# Altium PCB NS6202_V4.1.PcbDoc (part 2 of 2)
Units mm, origin at the board's own origin, x right, y up, seen from the top; angles counter-clockwise.
Board outline 63.75 x 63.6 mm, 4 copper layers (Top, VCC, GND, Bottom), stack 0.776 mm thick; 132 components, 151 nets, 534 pads, 404 vias.
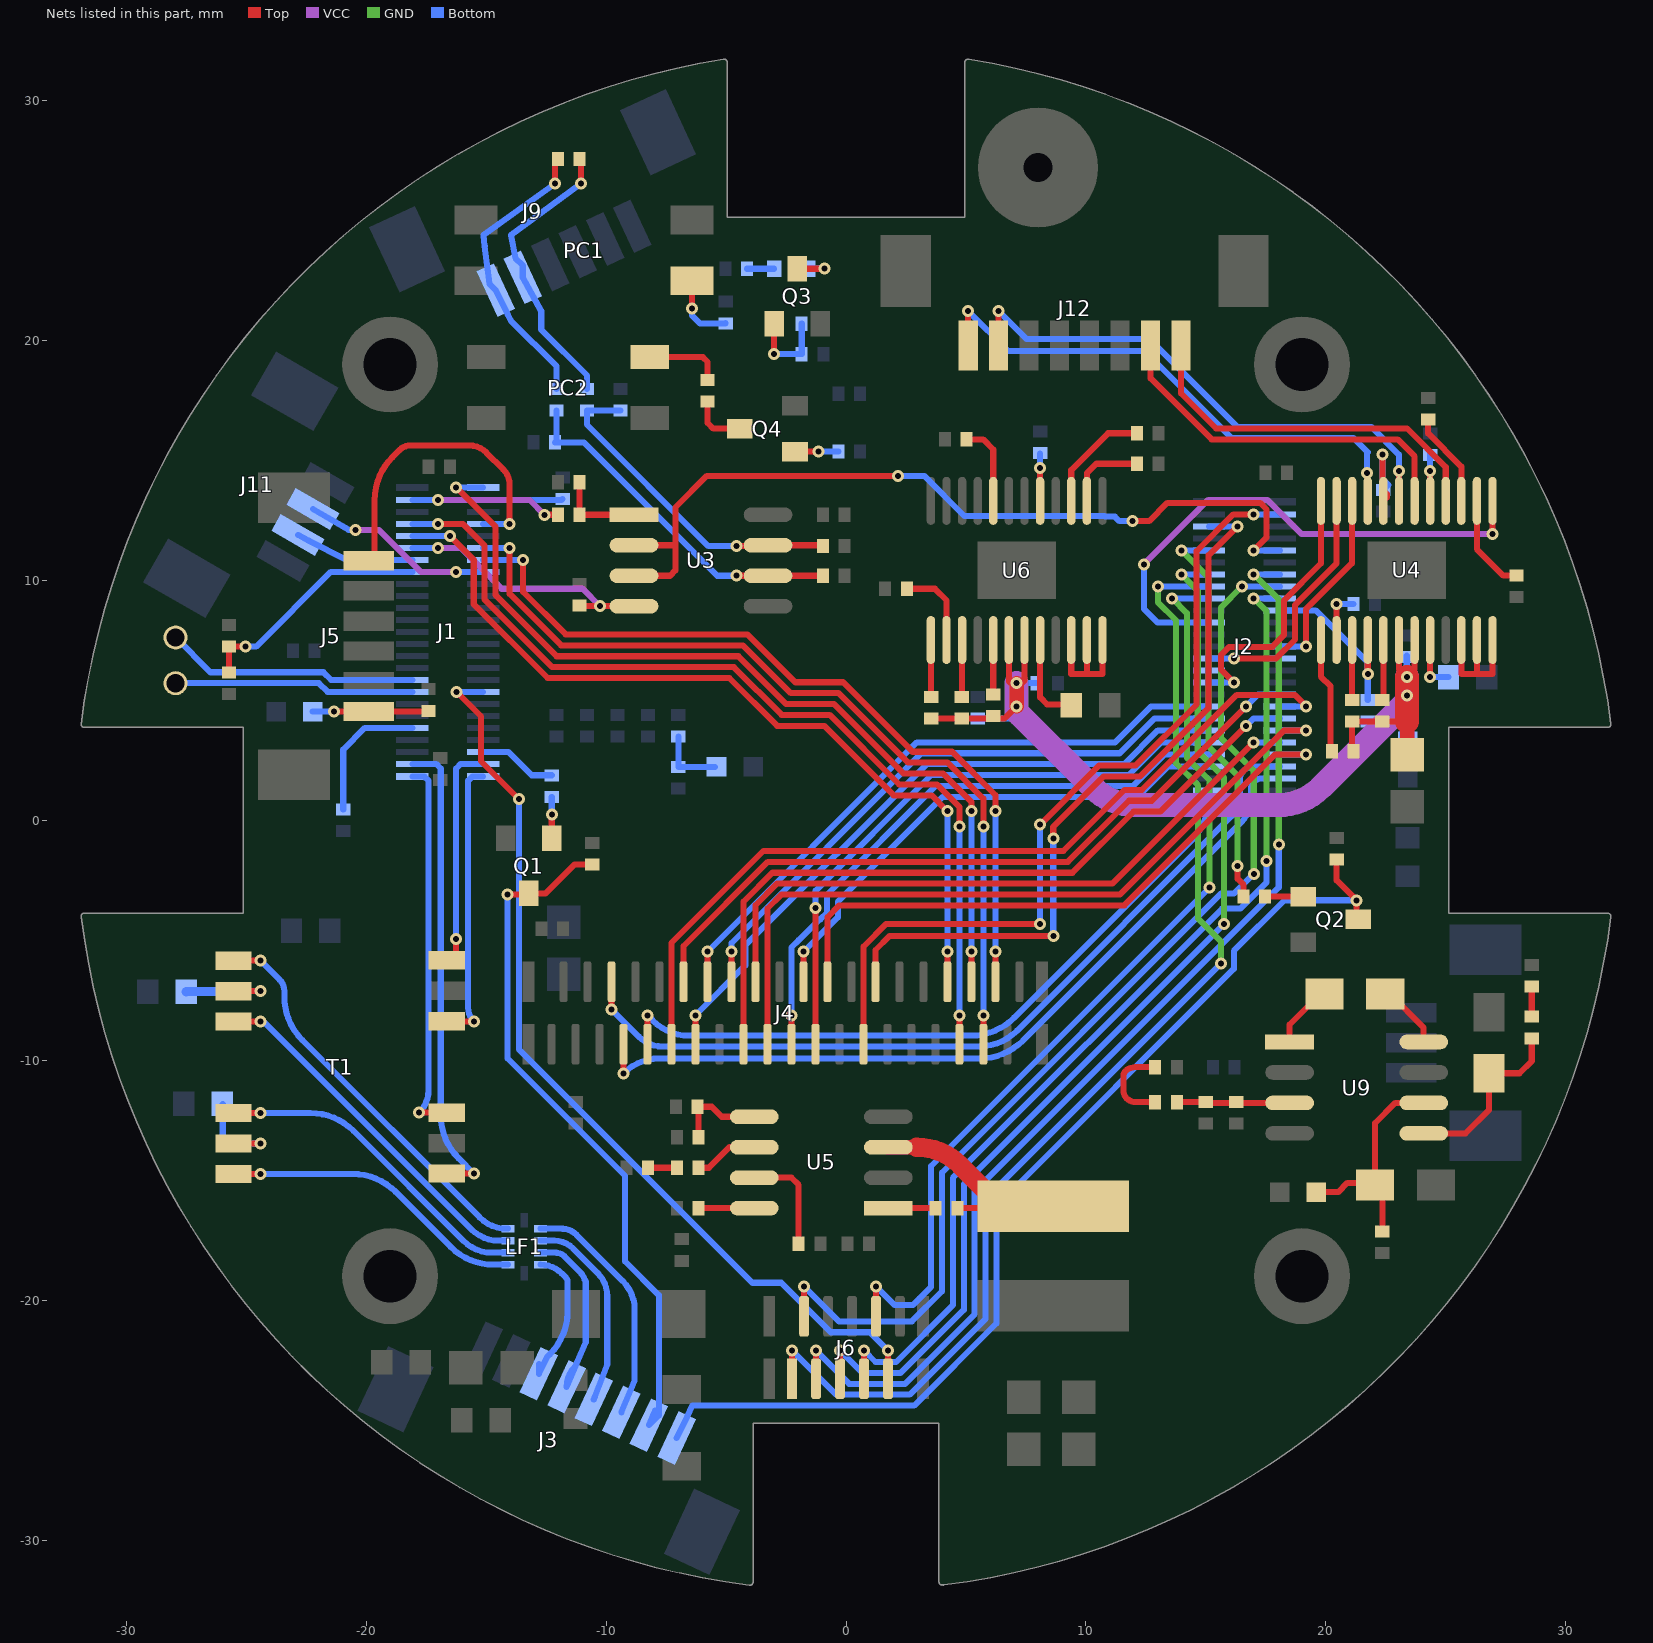
[diagram p4: the nets of this part, all layers, seen from the top]

## Via types
v1: diameter 0.5, hole 0.25, Top to Bottom, tented both sides, 403 vias
v2: diameter 0.5, hole 0.25, Top to Bottom, 1 vias

## Nets (pads, with @x,y where several pads share a name; then routed paths per layer and width w, separated by ;. In a path a pad name is that pad's centre, name@x,y a point inside that pad or via, vN(x,y) a via of type N, cw(c..) or ccw(c..) an arc to the next point about the centre after c; other vN are vias at no path point) (continued)
IR_PWM: J1.7 J5.6 | length 13.3
  Top w0.254: J5.6@-19.897,10.82 cw(c-19.651,10.574) -19.651,10.922 -19.651,13.333 cw(c-17.111,13.333) -19.431,14.367 cw(c-17.111,13.333) -18.907,15.129 -18.595,15.441 cw(c-18.161,15.008) -18.161,15.621 -15.698,15.621 cw(c-15.698,14.614) -14.986,15.326 -14.291,14.631 ; -14.29,14.63 cw(c-14.951,13.97) -14.017,13.97 v1(-14.017,12.35)
  Bottom w0.254: J1.7@-15.125,12.35 v1(-14.017,12.35)
LED0: J3.7 Q1.3 R5.2 | length 29.6
  Top w0.254: v1(-14.107,-3.093) v1@-14.059,-3.044 ; v1@-14.001,-3.093 Q1.3@-13.16,-3.093 ; Q1.3@-13.218,-3.044 -12.517,-3.044 -11.32,-1.847 R5.2@-10.583,-1.847
  Bottom w0.254: v1(-14.107,-3.093) -14.107,-9.925 -9.212,-14.82 -9.212,-18.374 -7.801,-19.785 -7.801,-24.794 J3.7@-8.213,-25.206 -8.033,-24.779 J3.7@-7.955,-24.592
LED1: J3.8 Q2.3 R6.2 | length 44.1
  Top w0.254: R6.2@20.447,-1.637 20.447,-2.499 v1(21.281,-3.333) 21.281,-4.067 Q2.3@21.344,-4.129
  Bottom w0.254: J3.8@-7.062,-25.743 -6.625,-24.846 -6.403,-24.391 2.838,-24.391 6.27,-20.959 6.27,-16.082 16.164,-6.188 16.164,-5.442 18.273,-3.333 v1(21.281,-3.333)
LED_GN: J2.10 R3.2 | length 16.7
  Top w0.254: v1(16.317,-1.905) 16.317,-2.442 16.568,-2.693 R3.2@16.568,-3.175
  GND w0.254: v1(13.97,11.25) 15.113,10.107 15.113,3.069 16.317,1.865 v1(16.317,-1.905)
  Bottom w0.254: v1(13.97,11.25) J2.10@15.125,11.25
LED_MLINK: J1.45 R4.2 | length 3.3
  Bottom w0.254: J1.45@-15.125,2.85 -14.07,2.85 -13.098,1.878 R4.2@-12.264,1.878
LENC_IRIS_PWM1: J2.30
LENC_IRIS_PWM2: J2.27
MVDD: C20.2 C21.2 C23.1 C26.1 C28.1 FB4.1 R27.2 R34.1 R35.2 R36.1 R49.1 R50.1 U4.18 U4.19 U6.18 U6.19 | length 48
  Top w0.254: R50.1@3.537,4.249 6.611,4.249 v1(7.112,4.75) ; U6.18@6.787,7.514 6.787,5.786 6.858,5.715 v1(7.112,5.715) 7.331,5.715 7.437,5.821 U6.19@7.437,7.514 ; R36.1@21.093,2.887 R34.1@21.093,4.122 23.368,4.122 23.381,4.109 ; U4.18@23.043,7.514 23.043,6.294 v1(23.368,5.969) 23.693,6.294 U4.19@23.693,7.514
  Top w0.6: v1(7.112,4.75) v1(7.112,5.715) ; C26.1@23.381,2.73 23.381,4.109
  Top w1: 23.368,4.122 v1(23.368,5.207) v1(23.368,5.969)
  VCC w1: v1(7.112,5.715) 7.112,4.532 10.265,1.379 ccw(c12.061,3.175) 12.061,0.635 18.007,0.635 ccw(c18.007,3.175) 19.804,1.379 23.368,4.943 v1(23.368,5.969)
  Bottom w0.254: R35.2@5.487,4.249 7.111,4.249 ; v1(7.112,5.715) C23.1@7.932,5.715 ; R27.2@21.743,4.122 23.368,4.122 ; v1(23.368,5.969) C28.1@23.368,6.858
  Bottom w0.6: 7.111,4.249 v1(7.112,4.75) ; FB4.1@23.368,3.302 23.368,4.122 v1(23.368,5.207)
N15229178: Q3.1 R9.2 R10.2 | length 3.7
  Top w0.254: v1(-2.996,19.431) -2.996,20.684 Q3.1@-2.991,20.69
  Bottom w0.254: v1(-2.996,19.431) R10.2@-1.847,19.431 R9.2@-1.847,20.701
N15229370: D2.1 Q3.3 | length 1.7
  Top w0.254: Q3.3@-2.037,22.983 -2.033,22.987 v1(-0.889,22.987)
  Bottom w0.254: D2.1@-1.472,22.987 v1(-0.889,22.987)
N15229490: PC1.1 R13.2 | length 3
  Top w0.254: v1(-6.416,21.336) PC1.1@-6.416,22.483
  Bottom w0.254: v1(-6.416,21.336) -6.416,21.034 -6.083,20.701 -5.032,20.701 R13.2@-5.019,20.715
N16657531: D2.2 R12.2 | length 1.1
  Bottom w0.254: R12.2@-4.122,22.987 D2.2@-2.996,22.987
N16698572: Q4.3 R14.2 | length 2.3
  Top w0.254: R14.2@-5.773,17.457 -5.773,16.568 -5.529,16.324 Q4.3@-4.422,16.324
N17016752: R41.2 U5.7 | length 4.4
  Top w0.254: U5.7@-3.824,-14.893 -2.273,-14.893 -1.974,-15.192 R41.2@-1.974,-17.653
N17016775: C13.1 U5.8 | length 2.3
  Top w0.254: C13.1@-6.146,-16.163 U5.8@-3.824,-16.163
N17016804: C14.1 U5.6 | length 2.7
  Top w0.254: C14.1@-6.154,-14.478 -5.715,-14.478 -4.86,-13.623 U5.6@-3.824,-13.623
N17016806: C14.2 R44.2 | length 1.2
  Top w0.254: R44.2@-8.244,-14.478 C14.2@-7.054,-14.478
N17016820: R42.2 R43.2 U5.5 | length 3.8
  Top w0.254: R43.2@-6.154,-13.242 -6.154,-11.938 -5.595,-11.938 -5.18,-12.353 U5.5@-3.824,-12.353
N17016832: C15.2 L1.1 U5.3 | length 11.7
  Top w0.254: C15.2@4.637,-16.163 8.559,-16.163 L1.1@8.636,-16.086
  Top w0.6: U5.3@1.764,-13.623 2.948,-13.623 ; L1.1@5.719,-15.342 ccw(c7.515,-13.546) 7.515,-16.086 L1.1@8.636,-16.086
  Top w0.8: 2.948,-13.623 cw(c2.948,-16.163) 4.744,-14.367 L1.1@5.719,-15.342
N17334107: C4.2 R23.1 R24.2 U3.7 | length 13.9
  Top w0.254: v1(-4.572,11.43) -3.556,11.43 -3.541,11.445 U3.7@-3.249,11.445 ; U3.7@-3.249,11.464 C4.2@-0.992,11.464
  Bottom w0.254: R24.2@-9.398,17.076 R23.1@-10.795,17.076 -10.795,16.49 -5.735,11.43 v1(-4.572,11.43)
N17334109: R28.1 R31.2 U3.1 | length 3.6
  Top w0.254: R28.1@-11.107,14.097 R31.2@-11.107,12.734 U3.1@-8.837,12.734
N17334111: C5.2 R22.1 R29.1 U3.6 | length 14.8
  Top w0.254: v1(-4.572,10.194) U3.6@-3.249,10.194 C5.2@-0.958,10.194
  Bottom w0.254: R29.1@-12.065,17.076 -12.065,15.806 R22.1@-12.123,15.748 -10.922,15.748 -5.368,10.194 v1(-4.572,10.194)
N17340800: PC2.2 R14.1 | length 3.1
  Top w0.254: PC2.2@-8.186,19.304 -5.969,19.304 -5.773,19.108 R14.1@-5.773,18.538
N17346161: C24.1 R32.1 | length 1.6
  Bottom w0.254: R32.1@-25.977,-13.469 C24.1@-25.977,-11.831
N17346163: C25.1 R33.1 | length 1.5
  Bottom w0.4: C25.1@-27.495,-7.137 R33.1@-25.977,-7.119
N17347463: Q1.1 R4.1 | length 1.7
  Top w0.254: Q1.1@-12.264,-0.751 v1(-12.264,0.232)
  Bottom w0.254: v1(-12.264,0.232) R4.1@-12.264,0.978
N17347493: Q2.1 R3.1 | length 1.6
  Top w0.254: R3.1@17.468,-3.175 Q2.1@19.05,-3.175
N17383042: R34.2 U4.15 | length 2.5
  Top w0.254: R34.2@21.093,5.022 U4.15@21.093,7.514
N17383730: R37.1 U6.5 | length 2
  Top w0.254: U6.5@8.087,13.314 v1(8.087,14.691)
  Bottom w0.254: v1(8.087,14.691) R37.1@8.087,15.281
N17383732: R40.1 U6.8 | length 3.4
  Top w0.254: R40.1@5.022,15.875 5.715,15.875 6.137,15.453 U6.8@6.137,13.314
N17383734: R46.2 U6.3 | length 4.7
  Top w0.254: U6.3@9.387,13.314 9.387,14.594 10.922,16.129 R46.2@12.123,16.129
N17383736: R48.2 U6.2 | length 3.4
  Top w0.254: U6.2@10.037,13.314 10.037,14.463 10.433,14.859 R48.2@12.123,14.859
N17383752: U6.22 U6.23 U6.24 | length 5.6
  Top w0.254: U6.22@9.387,7.514 9.387,6.096 10.037,6.096 ; U6.23@10.037,7.514 10.037,6.096 ; U6.24@10.687,7.514 10.687,6.096 10.037,6.096
N17383760: C22.1 U6.20 | length 3.8
  Top w0.254: U6.20@8.087,7.514 8.087,5.121 8.382,4.826 C22.1@9.392,4.826
N17383762: R39.2 U6.14 | length 3.5
  Top w0.254: R39.2@2.533,9.652 3.702,9.652 4.187,9.167 U6.14@4.187,7.514
N17383772: R49.2 U6.15 | length 2.4
  Top w0.254: R49.2@4.826,5.149 4.837,5.16 U6.15@4.837,7.514
N17383775: R50.2 U6.13 | length 2.4
  Top w0.254: R50.2@3.537,5.149 U6.13@3.537,7.514
N17383778: C20.1 U6.17 | length 2.4
  Top w0.254: C20.1@6.137,5.149 U6.17@6.137,7.514
N17383808: R45.1 U4.5 | length 1.9
  Top w0.254: U4.5@24.343,13.314 v1(24.343,14.549)
  Bottom w0.254: v1@24.343,14.564 R45.1@24.343,15.27
N17383810: R51.1 U4.8 | length 3.7
  Top w0.254: v1(22.352,15.24) 22.352,13.781 22.541,13.592 22.541,13.462 U4.8@22.393,13.314
  Bottom w0.254: v1(22.352,15.24) 22.352,14.231 22.606,13.977 R51.1@22.393,13.764
N17383812: R52.2 U4.3 | length 4
  Top w0.254: R52.2@24.257,16.695 24.257,16.129 25.643,14.743 U4.3@25.643,13.314
N17383820: R38.2 U4.2 | length 4.1
  Top w0.254: U4.2@26.293,13.314 26.293,11.299 27.392,10.2 R38.2@27.94,10.2
N17383828: U4.22 U4.23 U4.24 | length 5.5
  Top w0.254: U4.22@25.643,7.514 25.643,6.107 25.654,6.096 26.293,6.096 ; U4.23@26.293,7.514 26.293,6.096 ; U4.24@26.943,7.514 26.943,6.096 26.293,6.096
N17383836: C27.1 U4.20 | length 2.3
  Top w0.254: v1(24.343,5.969) U4.20@24.343,7.514
  Bottom w0.254: v1(24.343,5.969) C27.1@25.108,5.969
N17383838: R30.2 U4.14 | length 2.2
  Top w0.254: U4.14@20.443,7.514 20.443,9.013 v1(20.447,9.017)
  Bottom w0.254: v1(20.447,9.017) R30.2@21.14,9.017
N17383848: R36.2 U4.13 | length 4.8
  Top w0.254: U4.13@19.793,7.514 19.793,5.988 20.193,5.588 R36.2@20.193,2.887
N17383858: C21.1 U4.17 | length 2.5
  Top w0.254: C21.1@22.393,5.022 U4.17@22.393,7.514
N17393172: BC6.2 FB2.2 R54.2 | length 2.8
  Bottom w0.254: R54.2@-6.985,3.487 -6.985,2.857 BC6.2@-6.985,2.228 FB2.2@-5.467,2.228
N17393514: C9.2 C10.1 U9.5 | length 7.6
  Top w0.254: U9.5@24.074,-13.047 25.815,-13.047 26.797,-12.065 C10.1@26.797,-10.541 28.067,-10.541 28.575,-10.033 C9.2@28.575,-9.086
N17393522: BC9.1 BC10.1 FB3.2 U9.6 | length 9.5
  Top w0.254: FB3.2@19.604,-15.494 20.516,-15.494 20.897,-15.113 21.966,-15.113 BC10.1@22.045,-15.192 22.045,-12.626 22.894,-11.777 U9.6@24.074,-11.777 ; BC9.1@22.352,-17.134 BC10.1@22.352,-15.192
N17393524: C7.1 R56.2 R57.2 U9.3 | length 4.7
  Top w0.254: R57.2@13.785,-11.742 R56.2@14.986,-11.742 ; R56.2@14.986,-11.777 U9.3@18.486,-11.777
N17393534: C6.2 R57.1 | length 3.9
  Top w0.254: R57.1@12.718,-11.811 ccw(c12.718,-11.575) R57.1@12.885,-11.742 12.073,-11.742 cw(c12.073,-11.209) 11.696,-11.586 cw(c12.031,-11.251) 11.557,-11.251 11.557,-10.668 cw(c11.864,-10.668) 11.647,-10.451 cw(c12.043,-10.847) 12.043,-10.287 C6.2@12.885,-10.287
N17393612: C8.1 U9.8 | length 3.3
  Top w0.254: C8.1@21.913,-7.239 C8.1@22.479,-7.239 22.677,-7.239 24.074,-8.636 U9.8@24.074,-9.237
N17393640: C8.2 U9.1 | length 2.7
  Top w0.254: U9.1@18.486,-9.237 18.486,-8.509 19.756,-7.239 C8.2@19.939,-7.239
N17393646: C9.1 R55.2 | length 1.3
  Top w0.254: C9.1@28.575,-8.186 R55.2@28.575,-6.927
N17401413: J3.3 LF1.1 | length 6
  Bottom w0.254: J3.3@-12.799,-22.654 J3.3@-12.799,-23.067 -12.446,-22.353 -12.348,-22.256 ccw(c-14.144,-20.459) -11.604,-20.459 -11.604,-19.218 ccw(c-11.817,-19.218) -11.666,-19.068 -11.853,-18.881 ccw(c-12.728,-19.756) LF1.1@-12.728,-18.519
N17401416: J3.4 LF1.3 | length 8.1
  Bottom w0.254: LF1.3@-12.728,-18.019 -12.099,-18.019 cw(c-12.099,-18.525) -12.073,-18.019 cw(c-12.099,-18.525) -11.74,-18.167 -11.089,-18.819 cw(c-11.667,-19.398) -10.849,-19.398 ; J3.4@-11.307,-22.78 ccw(c-10.483,-23.604) J3.4@-11.648,-23.604 -10.849,-21.753 -10.849,-19.398 ; -10.849,-19.218 -10.849,-19.398
N17401419: J3.5 LF1.5 | length 8.4
  Bottom w0.254: LF1.5@-12.728,-17.519 -12.149,-17.519 cw(c-12.149,-18.603) -11.383,-17.837 -10.346,-18.874 cw(c-11.297,-19.826) -9.951,-19.826 -9.951,-22.683 -10.474,-24.026 J3.5@-10.515,-24.132
N17401422: J3.6 LF1.7 | length 10
  Bottom w0.254: LF1.7@-12.728,-17.019 -11.845,-17.019 cw(c-11.845,-17.883) -11.787,-17.021 cw(c-11.845,-17.883) -11.234,-17.272 -9.303,-19.204 cw(c-10.494,-20.395) -8.809,-20.395 -8.809,-23.329 J3.6@-9.364,-24.669
N17404961: Q4.1 R15.2 | length 1.8
  Top w0.254: Q4.1@-2.129,15.37 v1(-1.146,15.37)
  Bottom w0.254: v1(-1.146,15.37) R15.2@-0.323,15.37
N173250840: C15.1 U5.1 | length 2
  Top w0.254: U5.1@1.764,-16.163 C15.1@3.737,-16.163
POE_LINE_1_2+: R32.2 T1.15 | length 1.8
  Top w0.254: T1.15@-25.527,-13.469 v1(-24.398,-13.469) v1@-24.391,-13.469
  Bottom w0.254: R32.2@-25.077,-13.469 v1(-24.398,-13.469) v1@-24.391,-13.469
POE_LINE_3_6-: R33.2 T1.10 | length 1.8
  Top w0.254: T1.10@-25.527,-7.119 v1(-24.398,-7.119)
  Bottom w0.254: R33.2@-25.077,-7.119 v1(-24.398,-7.119)
RTS_485: J2.9 U3.2 U3.3 | length 35.6
  Top w0.254: U3.3@-8.837,10.194 -7.332,10.194 -7.112,10.414 -7.112,11.43 ; U3.2@-8.837,11.464 -7.146,11.464 -7.112,11.43 ; v1(2.17,14.351) -5.797,14.351 -7.112,13.036 -7.112,11.43 ; v1(11.938,12.468) 12.63,12.468 13.389,13.227 17.253,13.227 17.526,12.954 17.526,11.788 v1(16.988,11.25)
  Bottom w0.254: v1(2.17,14.351) 3.267,14.351 4.937,12.681 10.777,12.681 10.8,12.658 11.199,12.658 11.389,12.468 v1(11.938,12.468) ; v1(16.988,11.25) J2.9@18.075,11.25
SD0_CLK: J2.14 J6.5 | length 44.8
  Top w0.254: J6.5@-0.25,-23.271 v1(-0.25,-22.098)
  GND w0.254: v1(13.97,10.25) 14.659,9.561 14.659,2.881 15.748,1.792 v1(15.748,-4.325) v1@15.743,-4.325
  Bottom w0.254: v1(-0.25,-22.098) 0.681,-23.029 2.274,-23.029 4.908,-20.395 4.908,-15.165 v1(15.748,-4.325) ; v1(13.97,10.25) J2.14@15.125,10.25
SD0_CMD: J2.13 J6.3 | length 47.2
  Top w0.254: J6.3@-1.25,-23.271 v1(-1.25,-22.098)
  GND w0.254: v1(16.988,10.25) 18.034,9.204 v1(18.034,-1.014)
  Bottom w0.254: v1(-1.25,-22.098) 0.135,-23.483 2.462,-23.483 5.362,-20.583 5.362,-15.466 18.034,-2.794 v1(18.034,-1.014) ; v1(16.988,10.25) J2.13@18.075,10.25
SD0_DATA0: J2.17 J6.7 | length 42.7
  Top w0.254: J6.7@0.75,-23.271 v1(0.75,-22.098)
  GND w0.254: v1(16.988,9.25) 17.526,8.712 v1(17.526,-1.691)
  Bottom w0.254: v1(0.75,-22.098) 1.227,-22.575 2.086,-22.575 4.454,-20.207 4.454,-14.899 15.67,-3.683 16.428,-3.683 17.526,-2.585 v1(17.526,-1.691) ; v1(16.988,9.25) J2.17@18.075,9.25
SD0_DATA1: J2.18 J6.8 | length 39.8
  Top w0.254: J6.8@1.25,-20.671 v1(1.25,-19.431)
  GND w0.254: v1(13.589,9.25) 14.205,8.634 14.205,2.607 15.148,1.664 v1(15.148,-2.803)
  Bottom w0.254: v1(1.25,-19.431) 2.012,-20.193 2.796,-20.193 3.546,-19.443 3.546,-14.405 v1(15.148,-2.803) ; v1(13.589,9.25) J2.18@15.125,9.25
SD0_DATA2: J2.16 J6.1 | length 49.1
  Top w0.254: J6.1@-2.25,-23.271 v1(-2.25,-22.098)
  GND w0.254: v1(13,9.75) 13,9.086 13.751,8.335 13.751,2.378 14.671,1.458 14.671,-4.095 15.621,-5.045 v1(15.621,-5.969)
  Bottom w0.254: v1(-2.25,-22.098) -0.411,-23.937 2.65,-23.937 5.816,-20.771 5.816,-15.774 v1(15.621,-5.969) ; v1(13,9.75) J2.16@15.125,9.75
SD0_DATA3: J2.15 J6.2 | length 45.7
  Top w0.254: J6.2@-1.75,-20.671 v1(-1.75,-19.431)
  GND w0.254: v1(16.501,9.75) 15.619,8.868 15.619,3.446 16.993,2.072 v1(16.993,-2.23)
  Bottom w0.254: v1(-1.75,-19.431) -0.299,-20.882 1.176,-20.882 1.177,-20.883 2.748,-20.883 4,-19.631 4,-14.684 15.636,-3.048 16.174,-3.048 v1(16.993,-2.23) ; v1(16.501,9.75) J2.15@18.075,9.75
SD0_INS: J1.35 J6.9 | length 38.8
  Top w0.254: v1(-16.233,5.35) -15.212,4.329 -15.212,2.468 v1(-13.633,0.889) ; J6.9@1.75,-23.271 v1(1.75,-22.098)
  Bottom w0.254: v1(-16.233,5.35) J1.35@-15.125,5.35 ; v1(-13.633,0.889) -13.633,0.003 -13.63,0 -13.63,-9.543 -3.901,-19.273 -2.698,-19.273 -0.635,-21.336 0.988,-21.336 v1(1.75,-22.098)
TDN_OUT1: J2.3 J4.27 | length 35
  Top w0.254: J4.27@0.727,-9.331 0.727,-5.262 1.671,-4.318 v1(8.087,-4.318) ; v1(8.087,-0.181) 10.554,2.286 12.065,2.286 14.605,4.826 14.605,11.213 16.142,12.75 v1(16.988,12.75)
  Bottom w0.254: v1(8.087,-4.318) v1(8.087,-0.181) ; v1(16.988,12.75) J2.3@18.075,12.75
TDN_OUT2: J2.6 J4.28 | length 31.3
  Top w0.254: J4.28@1.227,-6.731 1.227,-5.404 1.805,-4.826 v1(8.636,-4.826) ; v1(8.636,-0.762) 8.636,-0.274 10.742,1.832 12.254,1.832 15.113,4.691 15.113,11.046 v1(16.317,12.25)
  Bottom w0.254: v1(8.636,-4.826) v1(8.636,-0.762) ; J2.6@15.125,12.25 v1(16.317,12.25)
TPRX+: J1.48 T1.1 | length 19.7
  Top w0.254: T1.1@-16.637,-14.723 v1(-15.508,-14.723)
  Bottom w0.254: J1.48@-18.075,2.35 -17.082,2.35 -16.891,2.159 -16.891,-12.288 ccw(c-14.351,-12.288) -16.147,-14.084 v1(-15.508,-14.723)
TPRX-: J1.50 T1.3 | length 15.8
  Top w0.254: v1(-17.787,-12.185) T1.3@-16.637,-12.185
  Bottom w0.254: J1.50@-18.075,1.825 -17.573,1.825 -17.399,1.651 -17.399,-11.248 cw(c-18.724,-11.248) v1(-17.787,-12.185)
TPRXN_CON: LF1.4 T1.14 | length 14
  Top w0.254: T1.14@-25.908,-12.199 v1(-24.398,-12.199)
  Bottom w0.254: v1(-24.398,-12.199) -22.323,-12.199 cw(c-22.323,-14.739) -20.527,-12.943 -15.943,-17.526 ccw(c-14.754,-16.336) -14.754,-18.019 LF1.4@-14.088,-18.019
TPRXP_CON: LF1.2 T1.16 | length 12.8
  Top w0.254: T1.16@-25.527,-14.739 v1(-24.398,-14.739) v1@-24.391,-14.739
  Bottom w0.254: v1(-24.398,-14.739) -20.567,-14.739 cw(c-20.567,-17.279) -18.771,-15.483 -16.479,-17.775 ccw(c-14.683,-15.979) -14.683,-18.519 LF1.2@-14.088,-18.519
TPTX+: J1.49 T1.6 | length 11.9
  Top w0.254: T1.6@-16.637,-8.375 -16.623,-8.389 v1(-15.508,-8.389)
  Bottom w0.254: v1@-15.508,-8.389 cw(c-14.929,-7.81) -15.748,-7.81 -15.748,1.651 -15.574,1.825 J1.49@-15.125,1.825
TPTX-: J1.47 T1.8 | length 9.6
  Top w0.254: T1.8@-16.637,-5.835 -16.247,-5.835 v1(-16.247,-4.95)
  Bottom w0.254: v1(-16.247,-4.95) -16.247,2.159 -16.056,2.35 J1.47@-15.125,2.35
TPTXN_CON: LF1.8 T1.9 | length 16.8
  Top w0.254: T1.9@-25.527,-5.849 v1(-24.398,-5.849)
  Bottom w0.254: v1(-24.398,-5.849) -23.6,-6.647 cw(c-24.066,-7.112) -23.408,-7.112 -23.408,-7.359 ccw(c-20.868,-7.359) -23.247,-8.247 ccw(c-20.868,-7.359) -22.664,-9.155 -15.271,-16.548 ccw(c-14.134,-15.41) -14.134,-17.019 LF1.8@-14.088,-17.019
TPTXP_CON: LF1.6 T1.11 | length 15.6
  Top w0.254: T1.11@-26.035,-8.389 v1(-24.398,-8.389)
  Bottom w0.254: v1(-24.398,-8.389) cw(c-24.398,-8.691) -24.185,-8.477 -15.621,-17.041 ccw(c-14.467,-15.887) -15.62,-17.042 ccw(c-14.467,-15.887) -14.467,-17.519 LF1.6@-14.088,-17.519
TRX_N: J9.5 R23.2 R26.2 | length 12.2
  Top w0.254: R26.2@-11.107,27.559 -11.049,27.501 v1(-11.049,26.543)
  Bottom w0.254: v1(-11.049,26.543) -13.106,25.019 -13.963,24.384 -13.779,23.431 -13.472,23.124 J9.5@-13.472,22.626 -12.7,21.219 -12.7,20.447 -10.795,18.542 R23.2@-10.795,17.976
TRX_P: J9.6 R26.1 R29.2 | length 12.2
  Top w0.254: v1(-12.123,26.543) -12.123,27.443 R26.1@-12.007,27.559
  Bottom w0.254: v1(-12.123,26.543) -15.113,24.384 -15.058,23.931 -14.865,22.358 J9.6@-14.605,22.098 -14.097,21.082 -13.97,20.828 -12.065,18.923 R29.2@-12.065,17.976
UART0_RXD: J1.34 TP1.1 | length 10.6
  Bottom w0.254: TP1.1@-27.94,7.62 -26.489,6.169 -21.783,6.169 -21.464,5.85 J1.34@-18.075,5.85
UART0_TXD: J1.36 TP2.1 | length 10
  Bottom w0.254: TP2.1@-27.94,5.715 -21.971,5.715 -21.606,5.35 J1.36@-18.075,5.35
UART1_RXD: J1.4 R31.1 | length 6.3
  Top w0.254: v1(-12.573,12.734) R31.1@-12.007,12.734
  VCC w0.254: v1(-17.003,13.35) -13.189,13.35 v1(-12.573,12.734)
  Bottom w0.254: J1.4@-18.075,13.35 v1(-17.003,13.35)
UART1_TXD: J1.12 R25.1 U3.4 | length 11.1
  Top w0.254: R25.1@-11.083,8.924 v1(-10.253,8.924) U3.4@-8.837,8.924
  VCC w0.254: v1(-17.003,11.35) -16.049,11.35 -14.351,9.652 -10.981,9.652 v1(-10.253,8.924)
  Bottom w0.254: J1.12@-18.075,11.35 v1(-17.003,11.35)
USB_DN: J1.15 J11.2 | length 8.1
  VCC w0.254: v1(-20.447,12.106) -19.472,12.106 -17.716,10.35 v1(-16.247,10.35)
  Bottom w0.254: J11.2@-22.221,12.974 -20.73,12.106 ; -20.708,12.093 -20.73,12.106 ; v1(-20.447,12.106) -20.73,12.106 ; v1(-16.247,10.35) J1.15@-15.125,10.35
USB_DP: J1.14 J11.3 | length 5
  Bottom w0.254: J11.3@-22.846,11.892 -22.39,11.657 -20.828,10.85 J1.14@-18.075,10.85
USB_VBUS: J1.16 R7.1 R8.1 | length 10
  Top w0.254: R7.1@-25.716,6.165 R8.1@-25.716,7.25 -25.04,7.25 v1(-25.029,7.239)
  Bottom w0.254: v1(-25.029,7.239) -24.582,7.239 -21.471,10.35 J1.16@-18.075,10.35
USB_VBUS_EN: J1.3 R16.1 | length 3.3
  Bottom w0.254: J1.3@-15.125,13.35 -11.854,13.35 R16.1@-11.811,13.393
USB_VBUS_OCN: J1.42 R17.1 | length 5.8
  Bottom w0.254: R17.1@-20.955,0.45 -20.955,2.948 -20.053,3.85 J1.42@-18.075,3.85
VD_CS: J1.11 J4.37 | length 36.5
  Top w0.254: v1(-14.017,11.35) -14.017,9.438 -11.872,7.293 -4.296,7.293 -2.302,5.299 -0.312,5.299 2.584,2.404 4.232,2.404 5.727,0.908 v1(5.727,-0.254) ; J4.37@5.727,-9.331 v1(5.727,-8.128)
  Bottom w0.254: J1.11@-15.125,11.35 v1(-14.017,11.35) ; v1(5.727,-8.128) v1(5.727,-0.254)
VD_D0: J2.35 J4.11 | length 36.3
  Top w0.254: J4.11@-7.273,-9.331 -7.273,-5.107 -3.445,-1.279 9.055,-1.279 11.604,1.27 12.334,1.27 16.291,5.227 18.7,5.227 v1(19.177,4.75)
  Bottom w0.254: J2.35@18.075,4.75 v1(19.177,4.75)
VD_D1: J2.33 J4.12 | length 30.7
  Top w0.254: J4.12@-6.773,-6.731 -6.773,-5.249 -3.257,-1.733 9.243,-1.733 11.792,0.816 12.741,0.816 v1(16.675,4.75)
  Bottom w0.254: v1(16.675,4.75) 17.175,5.25 J2.33@18.075,5.25
VD_D2: J2.40 J4.13 | length 28
  Top w0.254: J4.13@-6.273,-9.277 v1(-6.273,-8.128)
  Bottom w0.254: v1(-6.273,-8.128) -4.191,-6.046 -4.191,-5.207 3.358,2.342 11.592,2.342 13,3.75 J2.40@15.125,3.75
VD_D3: J2.36 J4.14 | length 26.4
  Top w0.254: J4.14@-5.773,-6.731 v1(-5.773,-5.472)
  Bottom w0.254: v1(-5.773,-5.472) 2.949,3.25 11.216,3.25 12.716,4.75 J2.36@15.125,4.75
VD_D4: J2.38 J4.16 | length 25.4
  Top w0.254: J4.16@-4.773,-6.731 v1(-4.773,-5.472)
  Bottom w0.254: v1(-4.773,-5.472) -4.773,-5.114 3.137,2.796 11.404,2.796 12.858,4.25 J2.38@15.125,4.25
VD_D5: J2.37 J4.17 | length 31.5
  Top w0.254: J4.17@-4.273,-9.331 -4.273,-3.391 -3.069,-2.187 9.431,-2.187 11.98,0.362 13.1,0.362 v1(16.675,3.937)
  Bottom w0.254: v1(16.675,3.937) 16.988,4.25 J2.37@18.075,4.25
VD_D6: J2.41 J4.18 | length 27.9
  Top w0.254: J4.18@-3.773,-6.731 -3.773,-3.533 -2.881,-2.641 11.097,-2.641 v1(16.988,3.25)
  Bottom w0.254: v1(16.988,3.25) J2.41@18.075,3.25
VD_D7: J2.39 J4.19 | length 32.3
  Top w0.254: J4.19@-3.273,-9.331 -3.273,-3.675 -2.693,-3.095 11.41,-3.095 18.255,3.75 v1(19.177,3.75)
  Bottom w0.254: J2.39@18.075,3.75 v1(19.177,3.75)
VD_D8: J2.44 J4.21 | length 25.1
  Top w0.254: J4.21@-2.273,-9.277 v1(-2.273,-8.128)
  Bottom w0.254: v1(-2.273,-8.128) -2.273,-5.297 -1.971,-4.995 -1.963,-4.995 -1.09,-4.122 -1.072,-4.122 -0.793,-3.842 -0.793,-3.093 3.734,1.434 11.968,1.434 13.284,2.75 J2.44@15.125,2.75
VD_D9: J2.46 J4.22 | length 21.7
  Top w0.254: J4.22@-1.773,-6.731 v1(-1.773,-5.472)
  Bottom w0.254: v1(-1.773,-5.472) -0.339,-4.038 -0.339,-3.389 4.03,0.98 12.156,0.98 13.426,2.25 J2.46@15.125,2.25
VD_D10: J2.42 J4.23 | length 25.4
  Top w0.254: J4.23@-1.273,-9.331 -1.273,-3.67 -1.27,-3.667 v1(-1.27,-3.645)
  Bottom w0.254: v1(-1.27,-3.645) -1.27,-2.928 3.546,1.888 11.78,1.888 13.142,3.25 J2.42@15.125,3.25
VD_D11: J2.43 J4.24 | length 26.6
  Top w0.254: J4.24@-0.773,-6.731 -0.773,-4.037 -0.285,-3.549 11.598,-3.549 17.897,2.75 v1(19.177,2.75)
  Bottom w0.254: J2.43@18.075,2.75 v1(19.177,2.75)
VD_HS: J2.45 J4.6 | length 35
  Top w0.254: v1(-9.779,-7.874) -9.779,-6.737 J4.6@-9.773,-6.731
  Bottom w0.254: v1(-9.779,-7.874) -8.636,-9.017 ccw(c-7.645,-8.026) -7.645,-9.428 5.53,-9.428 ccw(c5.53,-7.162) 7.131,-8.764 16.077,0.182 ccw(c15.284,0.976) 16.406,0.976 16.406,1.632 cw(c17.151,1.632) 16.408,1.683 cw(c17.151,1.632) 16.408,1.693 cw(c16.931,1.693) 16.561,2.062 cw(c17.015,1.608) 16.974,2.249 cw(c17.015,1.608) 17.015,2.25 J2.45@18.075,2.25
VD_LED: BC11.2 FB7.2 J5.1 | length 4.8
  Top w0.254: v1(-21.347,4.53) J5.1@-19.897,4.53 BC11.2@-17.433,4.53
  Bottom w0.254: FB7.2@-22.225,4.53 v1(-21.347,4.53)
VD_PCLK: J2.50 J4.9 | length 29.6
  Top w0.254: J4.9@-8.273,-9.331 v1(-8.273,-8.128)
  Bottom w0.254: v1(-8.273,-8.128) -8.062,-8.339 ccw(c-6.53,-6.807) -6.53,-8.974 5.207,-8.974 ccw(c5.207,-6.434) 6.235,-8.756 ccw(c5.207,-6.434) 7.003,-8.23 14.381,-0.852 ccw(c12.585,0.944) 15.125,0.944 J2.50@15.125,1.225
VD_RSTN: J1.1 J4.36 | length 37.2
  Top w0.254: v1(-16.247,13.875) -14.605,12.233 -14.605,9.384 -12.06,6.839 -4.484,6.839 -2.49,4.845 -0.5,4.845 2.396,1.95 4.044,1.95 5.227,0.766 v1(5.227,0.381) ; J4.36@5.227,-6.731 v1(5.227,-5.472)
  Bottom w0.254: v1(-16.247,13.875) J1.1@-15.125,13.875 ; v1(5.227,-5.472) v1(5.227,0.381)
VD_SCK: J1.8 J4.35 | length 38.9
  Top w0.254: v1(-17.003,12.35) -15.968,12.35 -15.059,11.441 -15.059,9.196 -12.248,6.385 -4.672,6.385 -2.678,4.391 -0.688,4.391 2.208,1.496 3.787,1.496 4.722,0.561 v1(4.722,-0.254) ; J4.35@4.727,-9.331 v1(4.727,-8.128)
  Bottom w0.254: J1.8@-18.075,12.35 v1(-17.003,12.35) ; v1(4.722,-0.254) 4.722,-8.123 v1(4.727,-8.128)
VD_SIMO: J1.10 J4.34 | length 35.2
  Top w0.254: v1(-16.51,11.85) -15.513,10.853 -15.513,9.008 -12.436,5.931 -4.86,5.931 -2.866,3.937 -0.909,3.937 1.987,1.042 3.566,1.042 v1(4.227,0.381) ; J4.34@4.227,-6.731 v1(4.227,-5.472)
  Bottom w0.254: J1.10@-18.075,11.85 v1(-16.51,11.85) ; v1(4.227,-5.472) v1(4.227,0.381)
VD_SOMI: J1.13 J4.38 | length 34
  Top w0.254: v1(-13.462,10.85) -13.462,9.525 -11.684,7.747 -4.108,7.747 -2.114,5.753 -0.124,5.753 2.772,2.857 4.42,2.857 6.223,1.054 v1(6.223,0.381) ; J4.38@6.227,-6.731 v1(6.227,-5.472)
  Bottom w0.254: J1.13@-15.125,10.85 v1(-13.462,10.85) ; v1(6.223,0.381) 6.227,0.377 v1(6.227,-5.472)
VD_VS: J2.47 J4.7 | length 33.3
  Top w0.254: J4.7@-9.273,-9.331 -9.273,-10.539 v1(-9.271,-10.541)
  Bottom w0.254: v1@-9.271,-10.541 cw(c-7.784,-12.028) -7.784,-9.925 5.56,-9.925 ; 5.574,-9.925 ccw(c5.574,-7.385) 7.37,-9.181 16.473,-0.078 ccw(c15.506,0.889) 16.874,0.889 16.874,1.291 cw(c17.332,1.291) 17.008,1.615 cw(c17.333,1.29) 17.333,1.75 17.399,1.75
ZOOM_AN: J12.7 U4.6 | length 15.6
  Top w0.254: J12.7@12.69,19.786 12.69,18.425 15.24,15.875 22.987,15.875 23.693,15.169 U4.6@23.693,13.314
ZOOM_AP: J12.8 U4.4 | length 15.7
  Top w0.254: J12.8@13.96,19.786 13.96,17.797 15.428,16.329 23.381,16.329 24.993,14.717 U4.4@24.993,13.314
ZOOM_BN: J12.2 U4.7 | length 22.5
  Top w0.254: J12.2@6.36,19.786 v1(6.36,21.219) ; U4.7@23.043,13.314 v1(23.043,14.549)
  Bottom w0.254: v1(6.36,21.219) 7.513,20.066 12.634,20.066 16.317,16.383 21.9,16.383 23.043,15.24 v1(23.043,14.549)
ZOOM_BP: J12.1 U4.9 | length 22.6
  Top w0.254: J12.1@5.09,19.786 v1(5.09,21.219) ; v1(21.717,14.478) 21.717,13.34 U4.9@21.743,13.314
  Bottom w0.254: v1(5.09,21.219) 6.751,19.558 12.446,19.558 16.075,15.929 21.155,15.929 21.743,15.341 21.717,15.315 v1(21.717,14.478)
ZOOM_CTRL_CLK: J2.28 U4.11 | length 10.4
  Top w0.254: v1(16.164,6.75) 17.926,6.75 18.712,7.536 18.712,8.979 20.447,10.714 20.447,13.31 U4.11@20.443,13.314
  Bottom w0.254: J2.28@15.125,6.75 v1(16.164,6.75)
ZOOM_CTRL_DIR: J2.32 U4.12 | length 11.6
  Top w0.254: v1(16.164,5.75) 15.621,6.293 15.621,6.882 15.966,7.227 17.761,7.227 18.258,7.724 18.258,9.167 19.793,10.702 U4.12@19.793,13.314
  Bottom w0.254: J2.32@15.125,5.75 v1(16.164,5.75)
ZOOM_CTRL_EN: J2.25 U4.10 | length 8
  Top w0.254: v1(19.166,7.25) 19.166,8.791 21.082,10.707 21.082,13.303 U4.10@21.093,13.314
  Bottom w0.254: J2.25@18.075,7.25 v1(19.166,7.25)
ZOOM_CTRL_NFAULT: J2.19 R27.1 U4.16 | length 7.5
  Top w0.254: v1(21.743,6.096) U4.16@21.743,7.514
  Bottom w0.254: J2.19@18.075,8.75 19.571,8.75 21.743,6.578 v1(21.743,6.096) R27.1@21.743,5.022
ZOOM_CTRL_NSLEEP: J2.22 U4.1 | length 22.4
  Top w0.254: v1(26.943,11.938) U4.1@26.943,13.314
  VCC w0.254: v1(12.415,10.668) 15.101,13.354 17.561,13.354 18.977,11.938 v1(26.943,11.938)
  Bottom w0.254: v1(12.415,10.668) 12.415,8.81 12.975,8.25 J2.22@15.125,8.25
pads on no net: J1.6 J1.18 J1.19 J1.20 J1.21 J1.23 J1.25 J1.38 J1.40 J2.5 J2.7 J2.20 J4.4 J4.29 J4.32 U9.7

## Polygon pours and split planes (outlines as drawn)
+3.3V on VCC "VCC-+3.3V" (solid, remove dead copper, pour order 6): -30.099,49.784 -34.544,45.339 -34.544,-19.812 -19.177,-35.179 26.162,-35.179 39.624,-21.717 36.322,-18.415 36.322,39.243 31.496,39.243 22.352,48.387
GND on GND "GND-GND" (solid, remove dead copper, pour order 8): -20.039,32.66 -37.184,15.515 -37.184,-19.156 -23.214,-33.126 32.412,-33.126 40.159,-25.379 40.159,24.532 33.047,31.644
GND on Bottom "Bottom-No Net" (solid, remove dead copper, pour order 2): -32.469,44.795 -33.739,43.525 -33.739,29.047 -33.739,-40.93 -30.564,-44.105 -28.659,-46.01 31.158,-46.01 32.936,-46.01 36.111,-42.835 35.095,-41.819 35.095,41.874 35.095,43.398 34.968,43.525
GND on Top "Top_GND" (solid, remove dead copper, pour order 4): -33.375,42.725 -34.264,41.836 -34.264,-40.587 -34.264,-42.238 -31.343,-45.159 -30.708,-44.524 28.474,-44.524 28.474,-43.127 31.522,-40.079 33.427,-38.174 33.427,41.074 33.427,42.471 31.014,44.884

## Other copper
Top:
  pour cut-out: -8.053,-22.715 -8.053,-25.629 -5.653,-25.629 -5.653,-22.715
  pour cut-out: -12.659,-19.048 -12.659,-22.098 -5.44,-22.098 -5.44,-19.051
  pour cut-out: 12.128,-14.662 5.143,-14.662 5.143,-21.647 12.128,-21.647
  region net +3.3V: 10.928,-20.236 10.928,-23.704 10.246,-24.385 7.034,-24.385 5.967,-23.591 5.973,-21.212 6.963,-20.236
VCC:
  pour cut-out: 3.279,11.567 3.905,12.192 4.278,12.192 4.278,11.441 4.445,11.274 4.22,11.049 3.305,11.049 3.285,11.07
  pour cut-out: -24.204,5.098 -25,4.302 -25,4 -24.234,4 -24.233,4.001
Bottom:
  region net DC12IN_CON: -15.621,-20.574 -15.875,-20.701 -16.29,-21.961 -15.911,-22.78 -15.414,-22.78 -14.915,-22.281 -14.683,-21.037 -15.256,-20.549
  pour cut-out: -14.754,-16.688 -14.754,-18.852 -12.212,-18.852 -12.212,-16.688
  region net +3.3V_VID: -12.264,-6.743 -12.264,-7.531 -12.619,-7.886 -12.619,-8.37 -12.398,-8.592 -11.147,-8.592 -10.889,-8.334 -10.889,-7.893 -11.363,-7.419 -11.363,-6.645
  region net +3.3V: -11.899,-4.181 -11.147,-3.429 -10.368,-3.429 -10.095,-3.702 -10.095,-4.866 -10.291,-5.062 -11.044,-5.062 -11.309,-4.796 -11.309,-4.524
  pour cut-out: 6.506,-23.432 10.287,-23.432 10.287,-21.037 6.506,-21.037
  pour cut-out: -15.621,-20.574
Multi-Layer:
  lines w0.254 net GND: -31.75,-4 -25,-4 -25,4 -31.741,4 ; -31.749,-4 ccw(c0,0) -4.019,-31.747 ; -31.749,4.001 cw(c0,0) -5.08,31.594 -5.08,25 5.08,25 5.08,31.591 ; -4,-31.747 -4,-25 4,-25 4,-31.741 ; 4.063,-31.741 ccw(c0,0) 31.747,-4.019 ; 5.1,31.591 cw(c0,0) 31.747,4.019 ; 31.747,-4 25,-4 25,4 31.747,4

## Silkscreen, mask and mechanical layers (free items; w line width, h text height)
Silkscreen Bottom:
  text "NS6202HD" at 18.034,-23.591 h2
  text "V4.0" at 12.192,-25.273 h1.52
Solder Mask Top:
  region: -4,-31.242 -4,-28.078 -4.064,-28.014 -4.117,-28.067 -8.1,-28.067 -9.979,-29.945
  lines w1: -31.3,-3.548 ccw(c0,0) -4.313,-31.203 ; -31.225,4.154 cw(c0,0) -4.723,31.144 ; 4.063,-31.237 ccw(c0,0) 31.228,-4.132 ; 4.579,31.165 cw(c0,0) 31.301,3.534
Solder Mask Bottom:
  lines w1: -31.289,-3.642 ccw(c0,0) -3.954,-31.251 ; -31.225,4.154 cw(c0,0) -4.867,31.122 ; 3.954,-31.251 ccw(c0,0) 31.268,-3.813 ; 4.455,31.183 cw(c0,0) 31.33,3.271